# EAGLE board PCB v30 (EAGLE 9.7.0)
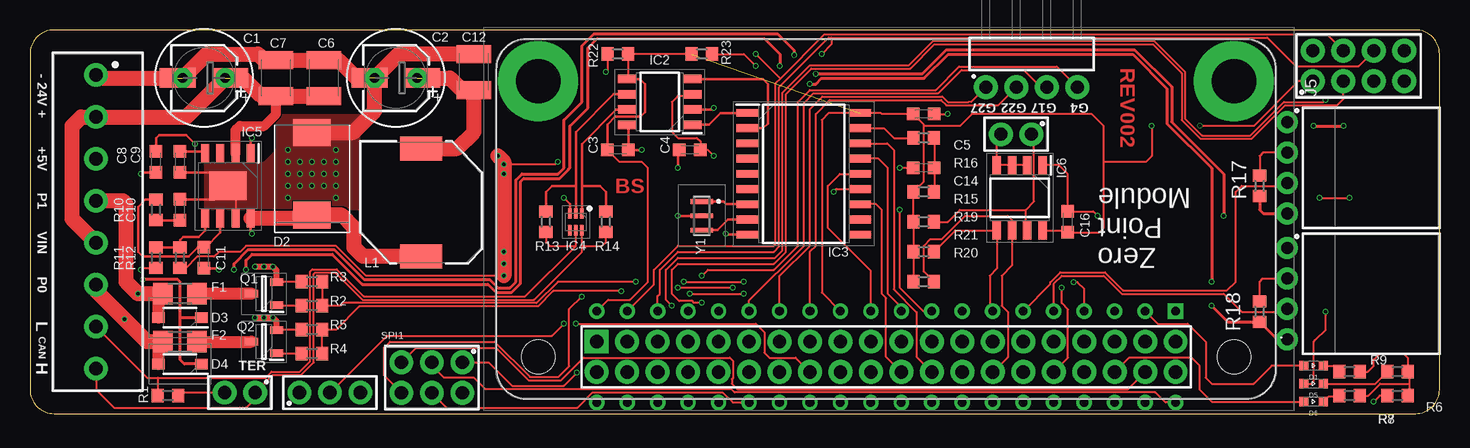
[diagram p0: board, top side]
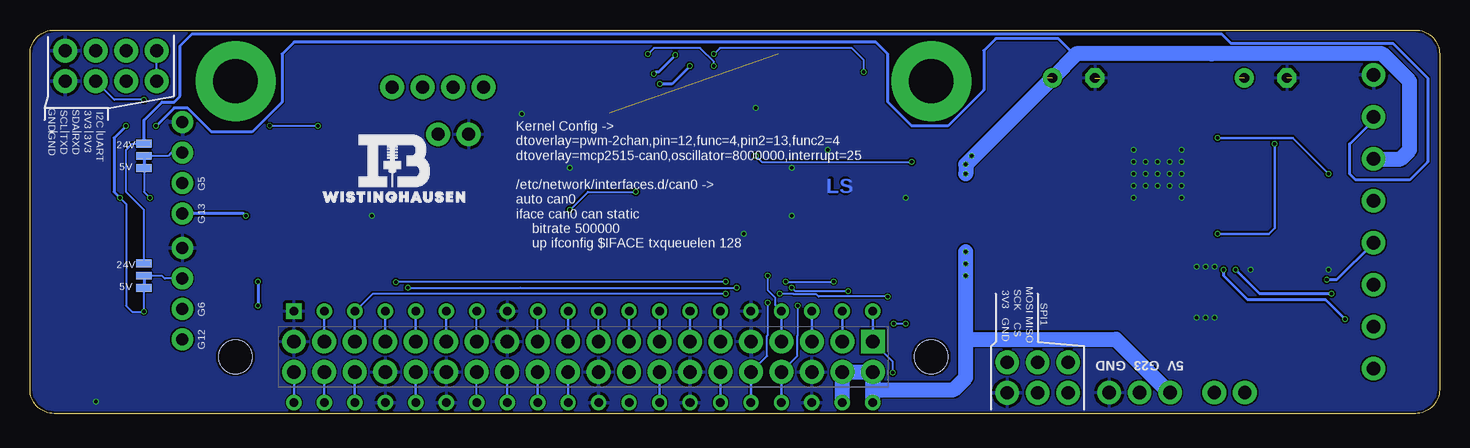
[diagram p1: board, bottom side, seen from below]

Size 117.5 x 32 mm. Coordinates in mm from the lower left corner, seen from the top.
Outline: 0,30 0,2 arc90 2,0 115.5,0 arc90 117.5,2 117.5,30 arc90 115.5,32 2,32 arc90 0,30
Copper layers (1*16): Top / Bottom
Stack-up Default Layer Stack: Top User Defined 0.035mm / Dielectric-1 User Defined 1.6mm / Bottom User Defined 0.035mm
Design rules "jlcpcb-2layers": minimum track width 5mil, minimum drill 0.3mm, track to track 5mil, track to pad 5mil, pad to pad 5mil, via to via 5mil, smd to smd 5mil, copper to edge 0.2mm, drill to drill 6mil, minimum pad ring 10mil, minimum via ring 3mil, stop-mask expansion 4mil, vias tented up to drill 0mil, thermal gap 10mil

## Footprints (pad centres in the part's own frame; a part is rotated, then mirrored left to right if it is on the bottom)
E3,5-8 = drill 0.813 pad 1.6: + -1.778,0 | drill 0.813 pad 1.6 octagon: - 1.778,0
C0603K = smd 1.05 x 1.08: 1 -0.875,0; 2 0.875,0
C1210K = smd 1.5 x 2.9: 1 -1.5,0; 2 1.5,0
WCAP-ASLL_5X5.5(DXL) = smd 3 x 1.6: 1 2.2,0; 2 -2.2,0
WL-SMCC_0603_R_Y_V = smd 0.75 x 0.8: 1 -0.825,0; 2 0.825,0
DIOM7959X625N = smd 2.252 x 3.12: 1 -3.457,0; 2 3.457,0
SOD3716X135N = smd 1.05 x 0.85: 1 -1.8,0; 2 1.8,0
R1206 = smd 1.6 x 1.803: 1 -1.422,0; 2 1.422,0
RASPBERRYPIZEROWV13 = drill 1.11 pad 1.665 square: 1 48.26,0.31 | drill 0.71: 1.2 48.26,-2.23; 2.2 48.26,5.39; 3.2 45.72,-2.23; 4.2 45.72,5.39; 5.2 43.18,-2.23; 6.2 43.18,5.39; 7.2 40.64,-2.23; 8.2 40.64,5.39; 9.2 38.1,-2.23; 10.2 38.1,5.39; 11.2 35.56,-2.23; 12.2 35.56,5.39; 13.2 33.02,-2.23; 14.2 33.02,5.39; 15.2 30.48,-2.23; 16.2 30.48,5.39; 17.2 27.94,-2.23; 18.2 27.94,5.39; 19.2 25.4,-2.23; 20.2 25.4,5.39; 21.2 22.86,-2.23; 22.2 22.86,5.39; 23.2 20.32,-2.23; 24.2 20.32,5.39; 25.2 17.78,-2.23; 26.2 17.78,5.39; 27.2 15.24,-2.23; 28.2 15.24,5.39; 29.2 12.7,-2.23; 30.2 12.7,5.39; 31.2 10.16,-2.23; 32.2 10.16,5.39; 33.2 7.62,-2.23; 34.2 7.62,5.39; 35.2 5.08,-2.23; 36.2 5.08,5.39; 37.2 2.54,-2.23; 38.2 2.54,5.39; 40.2 0,5.39 | drill 1.11 pad 1.665: 2 48.26,2.85; 3 45.72,0.31; 4 45.72,2.85; 5 43.18,0.31; 6 43.18,2.85; 7 40.64,0.31; 8 40.64,2.85; 9 38.1,0.31; 10 38.1,2.85; 11 35.56,0.31; 12 35.56,2.85; 13 33.02,0.31; 14 33.02,2.85; 15 30.48,0.31; 16 30.48,2.85; 17 27.94,0.31; 18 27.94,2.85; 19 25.4,0.31; 20 25.4,2.85; 21 22.86,0.31; 22 22.86,2.85; 23 20.32,0.31; 24 20.32,2.85; 25 17.78,0.31; 26 17.78,2.85; 27 15.24,0.31; 28 15.24,2.85; 29 12.7,0.31; 30 12.7,2.85; 31 10.16,0.31; 32 10.16,2.85; 33 7.62,0.31; 34 7.62,2.85; 35 5.08,0.31; 36 5.08,2.85; 37 2.54,0.31; 38 2.54,2.85; 39 0,0.31; 40 0,2.85 | drill 0.71 square: 39.2 0,-2.23 | drill 3.7 pad 6: P$1 -4.87,-21.42; P$2 53.13,-21.42 | hole 2.8: -4.87,1.58; 53.13,1.58
SOIC127P600X175-8N = smd 1.525 x 0.7: 1 -2.712,1.905; 2 -2.712,0.635; 3 -2.712,-0.635; 4 -2.712,-1.905; 5 2.712,-1.905; 6 2.712,-0.635; 7 2.712,0.635; 8 2.712,1.905
SOIC127P1030X265-18N = smd 1.85 x 0.65: 1 -4.675,5.08; 2 -4.675,3.81; 3 -4.675,2.54; 4 -4.675,1.27; 5 -4.675,0; 6 -4.675,-1.27; 7 -4.675,-2.54; 8 -4.675,-3.81; 9 -4.675,-5.08; 10 4.675,-5.08; 11 4.675,-3.81; 12 4.675,-2.54; 13 4.675,-1.27; 14 4.675,0; 15 4.675,1.27; 16 4.675,2.54; 17 4.675,3.81; 18 4.675,5.08
SON50P150X170X55-6N = smd 0.85 x 0.3: 1 -0.7,0.5; 2 -0.7,0; 3 -0.7,-0.5; 4 0.7,-0.5; 5 0.7,0; 6 0.7,0.5
SOIC127P600X170-9N = smd 1.525 x 0.65: 1 -2.712,1.905; 2 -2.712,0.635; 3 -2.712,-0.635; 4 -2.712,-1.905; 5 2.712,-1.905; 6 2.712,-0.635; 7 2.712,0.635; 8 2.712,1.905 | smd 2.4 x 3.1: 9 0,0
61300821121 = drill 1.1: 1 -3.81,-1.27; 2 -3.81,1.27; 3 -1.27,-1.27; 4 -1.27,1.27; 5 1.27,-1.27; 6 1.27,1.27; 7 3.81,-1.27; 8 3.81,1.27
61300311121 = drill 1.1: 1 -2.54,0; 2 0,0; 3 2.54,0
691243110008 = drill 1.1: 1 -12.25,0; 2 -8.75,0; 3 -5.25,0; 4 -1.75,0; 5 1.75,0; 6 5.25,0; 7 8.75,0; 8 12.25,0
61300621121 = drill 1.1: 1 -2.54,-1.27; 2 -2.54,1.27; 3 0,-1.27; 4 0,1.27; 5 2.54,-1.27; 6 2.54,1.27
66100411722 = drill 1: 1 3.81,2.7; 2 1.27,2.7; 3 -1.27,2.7; 4 -3.81,2.7
61300211121 = drill 1.1: 1 -1.27,0; 2 1.27,0
61300411021 = drill 1.1: 1 3.81,2.77; 2 1.27,2.77; 3 -1.27,2.77; 4 -3.81,2.77
SMT-JUMPER_3_1-NC_TRACE_NO-SILK = smd 0.635 x 1.27: 1 -1.016,0; 2 0,0; 3 1.016,0
WE-PD_1050P = smd 2 x 3.5: 1 -4.5,0; 2 4.5,0
SOT96P240X110-3N = smd 1.1 x 0.65: 1 -1.05,0.96; 2 -1.05,-0.96; 3 1.05,0
R0603 = smd 1 x 1.1: 1 -0.85,0; 2 0.85,0
CSTNE12M0GH5L000R0 = smd 0.4 x 1.9: 1 1.2,0; 2 0,0; 3 -1.2,0

## Placement (x,y rotation side)
C1  [E3,5-8]  14.5,28 180 top
C2  [E3,5-8]  30.5,28 180 top
C3  100nF  [C0603K]  49,22 180 top
C4  100nF  [C0603K]  55,22 0 top
C5  100nF  [C0603K]  74.5,25 180 top
C6  10uF 25V  [C1210K]  24.5,28 270 top
C7  10uF 25V  [C1210K]  20.5,28 270 top
C8  100nF  [C0603K]  10.5,21 270 top
C9  8.2nF  [C0603K]  12.5,21 90 top
C10  1nF  [C0603K]  12.5,17 270 top
C11  10pF  [C0603K]  14.5,13 90 top
C12  10uF 25V  [C1210K]  37,28.5 270 top
C13  47 µF  [WCAP-ASLL_5X5.5(DXL)]  14.5,28 0 top
C14  100nF  [C0603K]  74.5,20.5 0 top
C15  47 µF  [WCAP-ASLL_5X5.5(DXL)]  30.5,28 0 top
C16  100nF  [C0603K]  86.5,16 90 top
D1  RED  [WL-SMCC_0603_R_Y_V]  107,4 180 top
D2  DIODE  [DIOM7959X625N]  23.5,20 90 top
D3  1N4148W-TP  [SOD3716X135N]  12.5,8 180 top
D4  1N4148W-TP  [SOD3716X135N]  12.5,4.13 180 top
D5  RED  [WL-SMCC_0603_R_Y_V]  107,2.5 180 top
D6  RED  [WL-SMCC_0603_R_Y_V]  107,1 180 top
F1  24V 1A  [R1206]  12.5,10 0 top
F2  24V 1A  [R1206]  12.5,6 180 top
IC1  RASPBERRY_PI_ZERO_W__V1.3_  [RASPBERRYPIZEROWV13]  95.5,6.31 180 top
IC2  MCP2562T-E_SN  [SOIC127P600X175-8N]  52.5,26 180 top
IC3  MCP2515T-I_SO  [SOIC127P1030X265-18N]  64.5,20 0 top
IC4  ECMF02-2AMX6  [SON50P150X170X55-6N]  45.5,16 270 top
IC5  TPS54531DDAR  [SOIC127P600X170-9N]  16.5,19 270 top
IC6  CAT24C32WI-GT3  [SOIC127P600X175-8N]  82.5,18 270 top
J1  [61300821121]  110.75,29 0 top
J2  [61300311121]  25,1.75 0 top
J3  [691243110008]  5.5,16 270 top
J4  [61300621121]  33.5,3 180 top
J5  66100411722  [66100411722]  107.5,20.5 90 top
J6  66100411722  [66100411722]  107.5,10 90 top
J7  [61300211121]  17.5,1.75 180 top
J8  [61300411021]  83.5,30 180 top
J9  [61300211121]  82.2,23.3 180 top
JP1  JUMPER-SMT_3_1-NC_TRACE_NO-SILK  [SMT-JUMPER_3_1-NC_TRACE_NO-SILK]  108,21.5 270 bottom
JP2  JUMPER-SMT_3_1-NC_TRACE_NO-SILK  [SMT-JUMPER_3_1-NC_TRACE_NO-SILK]  108,11.5 270 bottom
L1  5.6uH  [WE-PD_1050P]  32.6,17.61 90 top
Q1  DMG3402L-7  [SOT96P240X110-3N]  19.5,10 180 top
Q2  DMG3402L-7  [SOT96P240X110-3N]  19.5,6 180 top
R1  120R  [R0603]  11.5,1.5 0 top
R2  1K  [R0603]  23.5,9 0 top
R3  100K  [R0603]  23.5,11 0 top
R4  1K  [R0603]  23.5,5 0 top
R5  100K  [R0603]  23.5,7 0 top
R6  1K96  [R0603]  114,3.5 0 top
R7  1K  [R0603]  110,3.5 0 top
R8  1K  [R0603]  110,1.5 0 top
R9  0R  [R0603]  114,1.5 0 top
R10  60K4  [R0603]  10.5,17 270 top
R11  1K96  [R0603]  10.5,13 270 top
R12  10K2  [R0603]  12.5,13 90 top
R13  0R/DNP  [R0603]  43,16 90 top
R14  0R/DNP  [R0603]  48,16 90 top
R15  10K2  [R0603]  74.5,18.5 180 top
R16  1K  [R0603]  74.5,23 180 top
R17  1K  [R0603]  102.5,19 270 top
R18  1K  [R0603]  102.5,8.5 270 top
R19  1K  [R0603]  74.5,16 180 top
R20  4K7  [R0603]  74.5,11 180 top
R21  4K7  [R0603]  74.5,13.5 180 top
R22  4K7  [R0603]  49,30 0 top
R23  4K7  [R0603]  56,30 180 top
Y1  CSTNE8M00GH5C000R0  [CSTNE12M0GH5L000R0]  56,16.5 90 top

## Library data of the parts
C1-C12 C14 C16 = rcl; SPICEPREFIX: C
C13 C15 = Wurth_Capacitors_WCAP-ASLL; DATASHEET-URL: https://www.we-online.com/catalog/datasheet/865060142003.pdf; DF: 22%; DIAMETER: 5mm; I-LEAK: 3uA; I-RIPPLE: 160mA; L: 5.5mm; OPERATING-TEMPERATURE: -55 °C up to +105 °C; PART-NUMBER: 865060142003; TECHNICAL-REFERENCE: ASEC055470M6R3DVCTBB000; VR: 6.3V(DC); Z: 0.8Ohm
D1 D5 D6 = Wurth_LEDs_WL-SMCC; ABSTRAHLWINKEL: 120°; CHIP-TECHNOLOGY: AlInGaP; DATASHEET-URL: https://www.we-online.com/catalog/datasheet/150060RS73220.pdf; EMITTING-COLOR: Red; I-V-TYP: 90mcd; LAMDA-DOM-TYP: 624nm; LAMDA-PEAK-TYP: 632nm; PART-NUMBER: 150060RS73220; V-F-TYP: 2V
D2 = Diode; CATEGORY: Diode; SUB-CATEGORY: Rectifier
D3 D4 = pke; ARROW_PART_NUMBER: 1N4148W-TP; ARROW_PRICE-STOCK: https://www.arrow.com/en/products/1n4148w-tp/micro-commercial-components; DESCRIPTION: MICRO COMMERCIAL COMPONENTS - 1N4148W-TP - SWITCHING DIODE, 150mA, 100V, SOD123, FULL REEL; HEIGHT: 1.35mm; MANUFACTURER_NAME: Micro Commercial Components (MCC); MANUFACTURER_PART_NUMBER: 1N4148W-TP; MOUSER_PART_NUMBER: 833-1N4148W-TP; MOUSER_PRICE-STOCK: https://www.mouser.co.uk/ProductDetail/Micro-Commercial-Components-MCC/1N4148W-TP?qs=KFo7JewZbUH7wCMabJ4EeQ%3D%3D
F1 F2 = adafruit
IC1 = Library; DESCRIPTION: Raspberry Pi Zero W (v1.3) Single-board Computers; HEIGHT: mm; MANUFACTURER_NAME: RASPBERRY-PI; MANUFACTURER_PART_NUMBER: Raspberry Pi Zero W (v1.3)
IC2 = Library; ARROW_PART_NUMBER: MCP2562T-E/SN; ARROW_PRICE-STOCK: https://www.arrow.com/en/products/mcp2562t-esn/microchip-technology?region=nac; DESCRIPTION: MICROCHIP - MCP2562T-E/SN - , CAN, ISO11898-2/5, CAN, 4.5 V, 5.5 V, NSOIC; HEIGHT: 1.75mm; MANUFACTURER_NAME: Microchip; MANUFACTURER_PART_NUMBER: MCP2562T-E/SN; MOUSER_PART_NUMBER: 579-MCP2562T-E/SN; MOUSER_PRICE-STOCK: https://www.mouser.co.uk/ProductDetail/Microchip-Technology/MCP2562T-E-SN?qs=eTPcRhULBzyVnEfrVUWSlA%3D%3D
IC3 = Library; ARROW_PART_NUMBER: MCP2515T-I/SO; ARROW_PRICE-STOCK: https://www.arrow.com/en/products/mcp2515t-iso/microchip-technology?region=nac; DESCRIPTION: Microchip Technology MCP2515T-I/SO, CAN Controller 1Mbit/s, 18-Pin SOIC; HEIGHT: 2.65mm; MANUFACTURER_NAME: Microchip; MANUFACTURER_PART_NUMBER: MCP2515T-I/SO; MOUSER_PART_NUMBER: 579-MCP2515T-I/SO; MOUSER_PRICE-STOCK: https://www.mouser.co.uk/ProductDetail/Microchip-Technology/MCP2515T-I-SO?qs=uMUszenkLLKzXVzy0vTLgQ%3D%3D
IC4 = pke; DESCRIPTION: Common Mode Filter & ESD Prot. USB uQFN6 STMicroelectronics ECMF02 Series, Signal Filter, 200mA uQFN SMD, Flat Contact Termination, 1.8 x 1.6 x 0.5mm; HEIGHT: 0.55mm; MANUFACTURER_NAME: STMicroelectronics; MANUFACTURER_PART_NUMBER: ECMF02-2AMX6; MOUSER_PART_NUMBER: 511-ECMF02-2AMX6; MOUSER_PRICE-STOCK: https://www.mouser.com/Search/Refine.aspx?Keyword=511-ECMF02-2AMX6; RS_PART_NUMBER: 8805276P; RS_PRICE-STOCK: http://uk.rs-online.com/web/p/products/8805276P
IC5 = pke; ARROW_PART_NUMBER: TPS54531DDAR; ARROW_PRICE-STOCK: https://www.arrow.com/en/products/tps54531ddar/texas-instruments?region=nac; DESCRIPTION: 3.5V to 28V Input, 5A, 570kHz Step-Down Converter with Eco-mode; HEIGHT: 1.7mm; MANUFACTURER_NAME: Texas Instruments; MANUFACTURER_PART_NUMBER: TPS54531DDAR; MOUSER_PART_NUMBER: 595-TPS54531DDAR; MOUSER_PRICE-STOCK: https://www.mouser.co.uk/ProductDetail/Texas-Instruments/TPS54531DDAR?qs=jA5Ki6243onykODzUePbag%3D%3D
IC6 = Library; ARROW_PART_NUMBER: CAT24C32WI-GT3; ARROW_PRICE-STOCK: https://www.arrow.com/en/products/cat24c32wi-gt3/on-semiconductor; DESCRIPTION: EEPROM Serial-I2C 32K 4Kx8 1.8V/5V SOIC8 CAT24C32WI-GT3, EEPROM Memory 32kbit,, 4096 x, 8bit, Serial-I2C 1.7 5.5 V, 8-Pin SOIC; HEIGHT: 1.75mm; MANUFACTURER_NAME: onsemi; MANUFACTURER_PART_NUMBER: CAT24C32WI-GT3; MOUSER_PART_NUMBER: 698-CAT24C32WI-GT3; MOUSER_PRICE-STOCK: https://www.mouser.co.uk/ProductDetail/onsemi/CAT24C32WI-GT3?qs=rZgeL6XvLwaTa79VuYkKQA%3D%3D
J1 = Wurth_Connectors_WR-PHD; DATASHEET-URL: https://katalog.we-online.com/em/datasheet/61300821121.pdf; GENDER: Pin Header; IR: 3A; MATES: WR-PHD 2.54mm Angled DualSocket Header/Dual Socket Header/Dual Socket Header Bottom Entry/Dual Socket Header Bottom Entry Large/SMT Dual Socket Header/SMT Dual Socket Header Bottom Entry; PACKAGING: Bag; PART-NUMBER: 61300821121; PINS: 8; ROWS: Dual; TYPE: Board Stacker
J2 = Wurth_Connectors_WR-PHD; DATASHEET-URL: https://katalog.we-online.com/em/datasheet/61300311121.pdf; GENDER: Pin Header; IR: 3A; MATES: WR-PHD 2.54mm Angled Socket Header /SMT Socket Header/Socket Header; PACKAGING: Bag; PART-NUMBER: 61300311121; PINS: 3; ROWS: Single; TYPE: Straight
J3 = Wurth_Connectors_WR-TBL Rising Cage Clamp; DATASHEET-URL: https://www.we-online.com/catalog/datasheet/691243110008.pdf; IR-UL: 10A; IR-VDE: 10A; MOUNT: THT; PART-NUMBER: 691243110008; PINS: 8; PITCH: 3.5mm; TYPE: Horizontal; WIRE: 30 to 16 (AWG) 0.05 to 1.31 (mm²); WORKING-VOLTAGE-UL: 300V (AC); WORKING-VOLTAGE-VDE: 130V (AC)
J4 = Wurth_Connectors_WR-PHD; DATASHEET-URL: https://katalog.we-online.com/em/datasheet/61300621121.pdf; GENDER: Pin Header; IR: 3A; MATES: WR-PHD 2.54mm Angled DualSocket Header/Dual Socket Header/Dual Socket Header Bottom Entry/Dual Socket Header Bottom Entry Large/SMT Dual Socket Header/SMT Dual Socket Header Bottom Entry; PACKAGING: Bag; PART-NUMBER: 61300621121; PINS: 6; ROWS: Dual; TYPE: Board Stacker
J5 J6 = Wurth_Connectors_WR-WTB; CONTACT-RESISTANCE: 20mOhm; DATASHEET-URL: https://www.we-online.com/catalog/datasheet/66100411722.pdf; GENDER: Male; IR: 3A; L: 9.86mm; MOUNT: THT; PACKAGING: Box; PART-NUMBER: 66100411722; PCB-CABLE-PANEL: PCB; PINS: 4; PITCH: 2.54mm; TOL-R: max.; TYPE: Right Angled; WORKING-VOLTAGE: 50V(AC)
J7 J9 = Wurth_Connectors_WR-PHD; DATASHEET-URL: https://katalog.we-online.com/em/datasheet/61300211121.pdf; GENDER: Pin Header; IR: 3A; MATES: WR-PHD 2.54mm Angled Socket Header /SMT Socket Header/Socket Header; PACKAGING: Bag; PART-NUMBER: 61300211121; PINS: 2; ROWS: Single; TYPE: Straight
J8 = Wurth_Connectors_WR-PHD; DATASHEET-URL: https://katalog.we-online.com/em/datasheet/61300411021.pdf; GENDER: Pin Header; IR: 3A; MATES: WR-PHD 2.5mm Angled Socket Header/SMT Socket Header/Socket Header/Soket Header Bottom Entry; PACKAGING: Bag; PART-NUMBER: 61300411021; PINS: 4; ROWS: Single; TYPE: Angled
JP1 JP2 = SparkFun-Jumpers
L1 = Wurth_Power Magnetics_WE-PD; DATASHEET-URL: https://www.we-online.com/catalog/datasheet/7447714056.pdf; FRES: 28MHz; IR: 6A; ISAT: 7.2A; JLC: C149541; MOUNT: SMT; PART-NUMBER: 7447714056; RDC-MAX: 14.4mOhm; RDC-TYP: 12mOhm; VERSION: Performance
Q1 Q2 = pke; ARROW_PART_NUMBER: DMG3402L-7; ARROW_PRICE-STOCK: https://www.arrow.com/en/products/dmg3402l-7/diodes-incorporated; DESCRIPTION: Diodes Inc DMG3402L-7 N-channel MOSFET Transistor, 4 A, 30 V, 3-Pin SOT-23; HEIGHT: 1.1mm; MANUFACTURER_NAME: Diodes Inc.; MANUFACTURER_PART_NUMBER: DMG3402L-7; MOUSER_PART_NUMBER: 621-DMG3402L-7; MOUSER_PRICE-STOCK: https://www.mouser.co.uk/ProductDetail/Diodes-Incorporated/DMG3402L-7?qs=M%2FOdCRO8QQ3OmR%252BxqWZuSw%3D%3D
R1-R23 = rcl; SPICEPREFIX: R
Y1 = pke; DESCRIPTION: Resonators 8.0000MHz 33pF SMD CHP Rsntr 0.07% AUTO; HEIGHT: 0.8mm; MANUFACTURER_NAME: Murata Electronics; MANUFACTURER_PART_NUMBER: CSTNE8M00GH5C000R0; MOUSER_PART_NUMBER: 81-CSTNE8M00GH5C000R; MOUSER_PRICE-STOCK: https://www.mouser.com/Search/Refine.aspx?Keyword=81-CSTNE8M00GH5C000R

## Nets
5VBOOT: C8.2 IC5.1
5VCOMP: C11.2 IC5.6 R10.1
5VPH: C8.1 D2.1 IC5.8 L1.1
5VSENSE: IC5.5 R11.1 R12.2
5VSS: C9.2 IC5.4
+3V3: C3.2 C5.2 C16.1 IC1.1 IC1.1.2 IC1.17 IC1.17.2 IC2.5 IC3.18 IC6.8 J1.1 J1.2 J4.1 R15.2 R19.2 R20.2 R21.2 R22.2 R23.2
+5V: C2.+ C4.2 C12.2 C15.1 D5.2 IC1.2 IC1.2.2 IC1.4 IC1.4.2 IC2.3 J2.1 J3.3 JP1.3 JP2.3 L1.2 R12.1
+24V: C1.+ C6.2 C7.2 C13.1 D3.1 D4.1 IC5.2 J3.2 J3.5 JP1.1 JP2.1
CAN_INT: IC1.22 IC1.22.2 IC3.12
CAN_RST: IC3.17 R16.2
CANH: IC2.7 IC4.1 R14.2
CANH_F: IC4.6 J3.8 J7.1 R14.1
CANL: IC2.6 IC4.2 R13.2
CANL_F: IC4.5 J3.7 R1.1 R13.1
GND: C1.- C2.- C3.1 C4.1 C5.1 C6.1 C7.1 C9.1 C10.1 C11.1 C12.1 C13.2 C14.1 C15.2 C16.2 D2.2 IC1.6 IC1.6.2 IC1.9 IC1.9.2 IC1.14 IC1.14.2 IC1.20 IC1.20.2 IC1.25 IC1.25.2 IC1.30 IC1.30.2 IC1.34 IC1.34.2 IC1.39 IC1.39.2 IC2.2 IC2.8 IC3.9 IC4.3 IC5.7 IC5.9 IC6.1 IC6.2 IC6.3 IC6.4 J1.7 J1.8 J2.3 J3.1 J4.2 J5.1 J6.1 J9.2 Q1.2 Q2.2 R3.1 R5.1 R9.1 R11.2 Y1.2
GPIO4: IC1.7 IC1.7.2 J8.4
GPIO5: IC1.29 IC1.29.2 J5.3
GPIO6: IC1.31 IC1.31.2 J6.3
GPIO7: IC1.26 IC1.26.2
GPIO16: D6.2 IC1.36 IC1.36.2
GPIO17: IC1.11 IC1.11.2 J8.3
GPIO22: IC1.15 IC1.15.2 J8.2
GPIO23: IC1.16 IC1.16.2 J2.2
GPIO26: D1.2 IC1.37 IC1.37.2
GPIO27: IC1.13 IC1.13.2 J8.1
ID_SCL: IC1.28 IC1.28.2 IC6.6 R20.1
ID_SDA: IC1.27 IC1.27.2 IC6.5 R21.1
ID_WP: IC6.7 J9.1 R19.1
LED_B: D6.1 R8.1
LED_COMMON: R6.2 R7.2 R8.2 R9.2
LED_G: D5.1 R6.1
LED_R: D1.1 R7.1
N$1: J6.2 JP2.2 R18.1
N$2: J5.2 JP1.2 R17.1
N$4: C14.2 R15.1 R16.1
N$7: IC3.8 Y1.3
N$8: IC3.7 Y1.1
N$49: C10.2 R10.2
N$111: J7.2 R1.2
PWM0: Q2.1 R4.1
PWM0_FUSE: F2.1 Q2.3
PWM0_GATE: IC1.32 IC1.32.2 R4.2 R5.2
PWM0_IN: D4.2 F2.2 J3.6 J6.4 R18.2
PWM1: Q1.1 R2.1
PWM1_FUSE: F1.2 Q1.3
PWM1_GATE: IC1.33 IC1.33.2 R2.2 R3.2
PWM1_IN: D3.2 F1.1 J3.4 J5.4 R17.2
RXCAN: IC2.4 IC3.2
RXD: IC1.10 IC1.10.2 J1.3
SCL: IC1.5 IC1.5.2 J1.6 R23.1
SDA: IC1.3 IC1.3.2 J1.4 R22.1
SPI1_CS: IC1.12 IC1.12.2 J4.4
SPI1_MISO: IC1.35 IC1.35.2 J4.6
SPI1_MOSI: IC1.38 IC1.38.2 J4.5
SPI1_SCK: IC1.40 IC1.40.2 J4.3
SPI_CS: IC1.24 IC1.24.2 IC3.16
SPI_MISO: IC1.21 IC1.21.2 IC3.15
SPI_MOSI: IC1.19 IC1.19.2 IC3.14
SPI_SCK: IC1.23 IC1.23.2 IC3.13
TXCAN: IC2.1 IC3.1
TXD: IC1.8 IC1.8.2 J1.5

## Tracks (layer width: path | path; a pad name or v marks a point on that pad's centre or on a via)
5VBOOT  (via drill 0.3)
  Top 0.2: IC5.1 18.41,22.91 v18.5,23 | v9.25,20 9.38,20.12 C8.2
  Bottom 0.2: v18.5,23 12.25,23 v9.25,20
5VCOMP
  Top 0.2: R10.1 9.6,17.85 9,17.25 9,13.5 9.38,13.12 13.22,13.12 13.97,13.88 C11.2 14.62,13.88 15.87,15.12 IC5.6
5VPH  (via drill 0.3)
  Top 0.2: C8.1 10.5,23 10.75,23.25 13,23.25 v13.75,22.5 | v18.5,15 18.41,15.1 IC5.8
  Top 1.27: IC5.8 23.25,16.29 D2.1 26,16.54 27.02,15.53 27.02,13.85 27.75,13.11 L1.1
  Bottom 0.2: v13.75,22.5 13.75,15.5 14.25,15 v18.5,15
5VSENSE
  Top 0.2: R11.1 R12.2 12.5,14.5 12.75,14.75 14.06,14.75 14.6,15.29 IC5.5
5VSS
  Top 0.2: C9.2 14.43,21.88 IC5.4
+3V3  (via drill 0.3)  (1 unrouted)
  Top 0.152: IC1.1.2 48.2,9.5 50,9.5 51.5,11 51.5,20.5 51,21 49.12,21 C3.2 | R23.2 R22.2 49.85,27.91 IC2.5 | IC6.8 86.34,15.29 C16.1 89.12,15.12 89.5,15.5 89.5,21 | R20.2 R21.2 R19.2 R15.2 74.5,19.35 74.5,24 | 74.5,24 74.5,24.12 C5.2 71,25 70.92,25.08 IC3.18 66.58,25.08 66,24.5 66,10.1 IC1.17.2 | 89.5,21 89.5,24 88.5,25 78.5,25 77.5,24 74.5,24 | J4.1 38.23,4.27 40.18,2.32 44.5,2.32 45.5,3.32 45.5,3.36 v45.57,3.43 | J1.1 105.73,27.73 102,24 97.54,24 v97.52,24.02 | v93.5,24 93.5,21.5 93,21 89.5,21
  Top 0.2: C3.2 48.12,24.12 48.79,24.79 50.9,24.79 51.25,25.15 51.25,27.5 50.85,27.91 IC2.5
  Bottom 0.15: J1.1 J1.2
  Bottom 0.152: v45.57,3.43 45.57,4.33 IC1.1 | v97.52,24.02 93.52,24.02 v93.5,24
  Bottom 0.2: IC1.1 IC1.1.2 | IC1.17 IC1.17.2
+5V  (via drill 0.3)  (1 unrouted)
  Top 0.152: R12.1 13,12.15 13.95,13.1 15.35,13.1 15.75,13.5 17.5,13.5 18,14 25.5,14 28,11.5 v39.5,11.5 | v57,21.5 56.5,22 C4.2 55.88,22.73 55.6,23 54,23 53.5,23.5 53.5,26 54,26.5 55.08,26.5 IC2.3 | v44,21 43.78,20.78 v39.5,20.78 | v108,8.5 108,7 107.15,6.15 107,6 107,2.7 106.8,2.5 D5.2 | v107.5,18 v110,18
  Top 0.254: v107,24 v109.5,24
  Top 1.27: 32.28,22.43 L1.2 35.61,22.11 37,23.5 C12.2 36,27 35,28 C2.+ | v39,21.5 39.5,21 v39.5,20 v39.5,11.5
  Bottom 0.152: v57,21.5 56.5,21 v44,21 | JP2.3 v108,8.5 109,8.5 109.5,9 109.5,17.5 v110,18 | JP1.3 108,18.5 v107.5,18
  Bottom 0.254: 19,30 30.5,30 31.79,31.29 37,31.29 38,30.29 38,27 41,24 44,24 46,26 46,30 47,31 95.5,31 96.5,30 96.5,26 99,23.5 102.36,23.5 104.36,25.5 105.5,25.5 v107,24 | v109.5,24 110.5,23 110.5,18.5 v110,18
  Bottom 1.27: IC1.2 IC1.4 IC1.4.2 | IC1.2.2 IC1.2 | IC1.2 47.24,2.24 47,2 40.5,2 39.5,3 39.5,6.2 | 39.5,6.2 v39.5,11.5 | v39.5,20 v39.5,20.78 C2.+ 30.28,30 19,30 4.77,30 2.5,27.73 2.5,22 3.25,21.25 J3.3 | v39.5,11.5 v39.5,12.5 | v39.5,11.5 v39.5,13.5 | J2.1 22.52,1.75 26.98,6.2 39.5,6.2
+24V  (via drill 0.3)  (1 unrouted)
  Top 0.254: D4.1 12.87,4.13 12.5,4.5 12.5,8 | 12.5,8 12.5,11 12.32,11.18 v9.4,11.18 | D3.1 12.5,8
  Top 0.813: IC5.2 17.14,23.64 17.5,24 19.5,24 20.5,25 C7.2
  Top 1.27: C6.2 C7.2 19.28,26.5 17.78,28 C1.+ 13.03,24.75 J3.2 4.25,24.75 3.5,24 3.5,16.25 J3.5
  Bottom 0.152: JP2.1 108,17 109.5,18.5 109.5,22 108.98,22.52 JP1.1
  Bottom 0.254: JP1.1 108,24.5 106.5,26 105.5,26 105,26.5 105,30.67 104,31.67 18.17,31.67 17.39,30.89 3.89,30.89 1,28 1,21 2.5,19.5 7,19.5 7.5,20 7.5,22.5 5.5,24.5 J3.2 | v9.4,11.18 8.57,11.18 J3.5
CAN_INT
  Top 0.152: IC1.22 71.37,4.73 71.37,9.63 71,10 71,17 70.5,17.5 69.22,17.5 IC3.12
  Bottom 0.2: IC1.22.2 IC1.22
CAN_RST
  Top 0.152: IC3.17 71.19,23.81 72,23 R16.2
CANH
  Top 0.152: IC4.1 46,17
  Top 0.2: IC2.7 48.87,25.36 46,22.5 46,19 | 46,19 46,17 | R14.2 48,18.5 47.5,19 46,19
CANH_F
  Top 0.152: J3.8 5.5,2 7,0.5 17.5,0.5 17.77,0.5 18,0.5 18.77,1.27 J7.1 20.25,3.22 22.62,3.22 23.65,4.25 23.65,11.63 23.77,11.75 25.46,11.75 27.71,9.5 42,9.5 46,13.5 46,14 | 46,14 IC4.6 | 46,14 47.7,14 48,14.3 R14.1
CANL
  Top 0.2: IC2.6 48.63,26.64 45.5,23.5 45.5,19 | 45.5,19 IC4.2 | R13.2 43,18.5 43.5,19 45.5,19
CANL_F
  Top 0.152: J3.7 9.75,3 10.65,3 | 10.65,3 R1.1 | 45.5,14 IC4.5 | R13.1 43,14.3 43.3,14 45.5,14 | 10.65,3 19.63,3 20.13,3.5 22.49,3.5 23.35,4.37 23.35,11.85 23.53,12.03 25.57,12.03 27.82,9.78 41.28,9.78 45.5,14
GND  (via drill 0.3)  (2 unrouted)
  Top 0.152: Q2.2 20.55,7 R5.1 | R3.1 22.61,10.96 Q1.2 | R11.2 9.4,12.15 v9.25,12 | IC5.7 17.14,18.36 IC5.9 | C5.1 v76.5,25 | C14.1 v72.5,20.5 | R9.1 112.5,1.5 v112,1 | IC6.1 85.79,20.71 86.5,20 C16.2 88.62,16.88 v89,16.5 | IC6.2 IC6.3 IC6.4 80.59,22.96 J9.2
  Top 0.2: C9.1 15.38,20.12 IC5.9 15.38,17.88 C10.1 | v15.75,12 15.62,12.12 C11.1 | IC2.8 49.88,24.02 C3.1 v51,22 | C4.1 54,21.88 v54,20.5 | IC4.3 45,17.5 v44.5,18 | Y1.2 v54,16.5 | IC3.9 58.08,14.92 v58,15 | IC2.2 56.87,25.36 v57,25.5
  Top 0.508: Q2.2 20.55,7.7 v20.25,8 v19.5,8 v18.75,8 | Q1.2 20.55,11.95 v20.25,12.25 v19.5,12.25 v18.75,12.25
  Top 1.27: J3.1 5.75,28.25 6,28 C1.- 14.72,30 19,30 19.5,29.5 C7.1 C6.1 25.72,29.5 27.22,28 C2.- | C12.1 30.72,30 C2.- | D2.2 26.96,23.46 28.72,25.22 C2.-
  other vias: 23.5,20 22.5,20 21.5,20 21.5,21 22.5,21 23.5,21 24.5,20 25.5,20 25.5,21 24.5,21 25.5,19 24.5,19 23.5,19 22.5,19 21.5,19 21.5,22 25.5,22 21.5,18 25.5,18
  pour Top (no thermals): 14.5,21 14.5,17 27.5,17 27.5,25 20.5,25 20.5,22 19.5,21
  pour Bottom: -0.5,32 -0.5,0 117.5,0 117.5,32
GPIO4  (via drill 0.3)
  Top 0.152: v56,11.5 56.5,12 62,12 64,14 64,26 65,27 75.5,27 77.44,28.94 85.6,28.94 J8.4
  Bottom 0.152: IC1.7.2 55.37,9.05 55.37,9.65 56,10.28 v56,11.5
  Bottom 0.2: IC1.7 IC1.7.2
GPIO5
  Top 0.152: J5.3 104.57,19 101,19 100.5,18.5 100.5,11 99.78,10.28 91.12,10.28 89.62,11.78 85.88,11.78 85.06,10.96 85.06,10.8 IC1.29.2
  Bottom 0.2: IC1.29 IC1.29.2
GPIO6
  Top 0.152: IC1.31.2 85.34,10.84 86,11.5 89.5,11.5 91,10 99.5,10 101,8.5 104.57,8.5 J6.3
  Bottom 0.2: IC1.31 IC1.31.2
GPIO7
  Bottom 0.2: IC1.26.2 IC1.26
GPIO16
  Top 0.152: IC1.36 91.62,4.66 96.84,4.66 97.5,4 97.5,2 98.5,1 D6.2
  Bottom 0.2: IC1.36.2 IC1.36
GPIO17
  Top 0.152: IC1.11.2 59.94,9.44 64.5,14 64.5,25.89 65.33,26.72 75.72,26.72 77.66,28.66 82.84,28.66 84.27,27.23 J8.3
  Bottom 0.2: IC1.11 IC1.11.2
GPIO22
  Top 0.152: IC1.15.2 65.02,13.52 65.5,14 65.5,25 66.66,26.16 75.94,26.16 76.38,25.72 80.72,25.72 J8.2
  Bottom 0.2: IC1.15 IC1.15.2
GPIO23  (via drill 0.3)
  Top 0.152: J2.2 29.75,6.5 43.5,6.5 v44.5,7.5 | v45.5,7.5 60.5,7.5 61.21,6.79 61.21,5.08 61.63,4.66 63.82,4.66 IC1.16
  Bottom 0.152: v44.5,7.5 v45.5,7.5
  Bottom 0.2: IC1.16.2 IC1.16
GPIO26
  Top 0.152: IC1.37.2 94,7.5 96.5,7.5 98,6 98,3 98.5,2.5 102,2.5 103.5,4 D1.2
  Bottom 0.2: IC1.37 IC1.37.2
GPIO27
  Top 0.152: IC1.13.2 62.48,11.48 65,14 65,25.39 66.05,26.44 76.06,26.44 76.5,26 78.23,26 78.47,26.01 J8.1
  Bottom 0.2: IC1.13 IC1.13.2
ID_SCL
  Top 0.152: R20.1 74.5,11.85 74.5,13.99 75.07,14.55 76.01,14.55 77.95,16.5 81.5,16.5 81.86,16.14 IC6.6 81.86,12.37 81,11.5 81,9 81.5,8.5 81.5,4.7 IC1.28
  Bottom 0.152: IC1.28.2 IC1.28
ID_SDA
  Top 0.152: R21.1 77.14,15.29 IC6.5 80.59,12.1 80,11.5 80,8.8 IC1.27.2
  Bottom 0.152: IC1.27 IC1.27.2
ID_WP
  Top 0.152: R19.1 76.5,16 77.5,17 83,17 | 83,17 83.69,17.69 83.69,23.08 J9.1 | IC6.7 83,15.42 83,17
LED_B
  Top 0.152: R8.1 109.08,1.43 108.25,1.43 D6.1
LED_COMMON
  Top 0.152: R8.2 111.55,1.5 112.55,2.5 115,2.5 | 115,2.5 115,3.35 R6.2 114.85,4.65 114.5,5 112.5,5 112,4.5 112,4 111.5,3.5 R7.2 | R9.2 115,1.65 115,2.5
LED_G
  Top 0.152: R6.1 112.15,2.5 D5.1
LED_R
  Top 0.152: D1.1 108.65,4 R7.1
N$1
  Top 0.152: R18.1 102.5,11 102.77,11.27 J6.2
  Bottom 0.152: J6.2 106.27,11.27 106.5,11.5 JP2.2
N$2
  Top 0.152: J5.2 102.77,21.77 102.5,21.5 R17.1
  Bottom 0.152: J5.2 105.73,21.77 106,21.5 JP1.2
N$4
  Top 0.152: R16.1 75.38,22.98 C14.2 75.38,18.52 R15.1
N$7
  Top 0.2: Y1.3 57.3,15.3 58.19,16.19 IC3.8
N$8
  Top 0.2: Y1.1 57.8,17.7 58.04,17.46 IC3.7
N$49
  Top 0.2: C10.2 10.53,16.12 R10.2
N$111
  Top 0.15: J7.2 12.6,1.75 R1.2
PWM0
  Top 0.152: Q2.1 22.61,5.04 R4.1
PWM0_FUSE
  Top 1.016: F2.1 Q2.3
PWM0_GATE  (via drill 0.3)
  Top 0.15: IC1.32 86.54,4.66 86.54,8.68 86,9.22 v86,10.49 | v58.57,10.5 v54,10.5
  Top 0.152: 24.5,7 25.5,7 27.44,8.94 42.34,8.94 43.61,10.22 v49.28,10.22 | 24.5,7 R5.2 | R4.2 24.35,6.85 24.5,7
  Bottom 0.15: v54,10.5 53.72,10.22 v49.28,10.22 | v86,10.49 76.64,10.49 76.62,10.5 v58.57,10.5
  Bottom 0.2: IC1.32.2 IC1.32
PWM0_IN  (via drill 0.3)
  Top 0.254: v18,12 18,12.79 18.5,13.29 25.2,13.29 27.7,10.79 38.17,10.79 38.84,10.12 40.16,10.12 40.88,10.84 40.88,19.34 41.16,19.62 44.16,19.62 44.88,20.34 44.88,20.38 45,20.5 45,24 46.5,25.5 46.5,30.5 47.29,31.29 61.21,31.29 62.5,30 v62.5,29 | v65,27.5 65.5,27.5 65.97,27.97 74.54,27.97 76.54,29.97 91.92,29.97 94.79,27.1 94.79,24.17 98.5,20.46 v98.5,11 | v98.5,9 99.85,7.65 R18.2 103.96,6.19 J6.4
  Top 1.016: F2.2 10.7,5.62 D4.2
  Top 1.27: J3.6 5.5,10.25 v7.88,7.88 9.75,6 F2.2
  Bottom 0.254: v7.88,7.88 9.5,9.5 16,9.5 18,11.5 v18,12 | v62.5,29 64,27.5 v65,27.5 | v98.5,11 v98.5,9
PWM1
  Top 0.152: Q1.1 22.61,9.04 R2.1
PWM1_FUSE
  Top 1.016: Q1.3 F1.2
PWM1_GATE  (via drill 0.3)
  Top 0.15: v54.5,11 v59.5,11 | v50.5,11 44,11 42.22,9.22 26.07,9.22 25.85,9 R2.2 | IC1.33.2 87.88,10.39 87.33,10.94 v87,10.94
  Top 0.152: R3.2 R2.2
  Bottom 0.15: v54.5,11 v50.5,11 | v59.5,11 86.94,11 v87,10.94
  Bottom 0.2: IC1.33 IC1.33.2
PWM1_IN  (via drill 0.3)
  Top 0.254: v17,12 17,12.5 18.17,13.67 25.36,13.67 27.86,11.17 38.33,11.17 39,10.5 40,10.5 40.5,11 40.5,19.5 41,20 44,20 44.5,20.5 44.5,24.5 46,26 46,30.67 47,31.67 62.33,31.67 63.7,30.3 v63.7,29.9 | v65.5,28.35 74.38,28.35 76.38,30.35 92.08,30.35 95.17,27.26 95.17,24.33 99.5,20 v99.5,16.5 | R17.2 102.5,17 102.81,16.69 J5.4
  Top 1.016: F1.1 10.7,9.62 D3.2
  Top 1.27: J3.4 7.75,17.75 8,17.5 8,11 v9,10 F1.1
  Bottom 0.254: v9,10 15,10 v17,12 | v63.7,29.9 65.1,28.5 65.35,28.5 v65.5,28.35 | v99.5,16.5 99.69,16.69 J5.4
RXCAN
  Top 0.2: IC2.4 61.09,27.91 61.5,27.5 61.5,24.2 61.11,23.81 IC3.2
RXD  (via drill 0.3)
  Top 0.152: J1.3 109.48,26.23 108.97,25.72 104.65,25.72 101.85,22.92 97.58,22.92 96,24.5 96,28.39 93.59,30.8 75.41,30.8 73.38,28.78 65.14,28.78 63,26.64 63,13.5 62,12.5 54,12.5 53.5,12 53.5,10 54.12,9.38 55.21,9.38 55.34,9.25 v56,9.25
  Bottom 0.152: IC1.10 56.06,4.8 56.06,6.5 56,6.56 v56,9.25
  Bottom 0.2: IC1.10.2 IC1.10
SCL  (via drill 0.3)
  Top 0.152: IC1.5.2 52.32,9.82 52.5,10 52.5,12 54,13.5 62,13.5 62.44,13.94 62.44,27.23 66.57,31.36 66.8,31.36 | 66.8,31.36 103.14,31.36 105.5,29 110.75,29 J1.6 | R23.1 59.5,30 v60.5,29 | 66.8,31.36 66.8,30.8 v66,30
  Bottom 0.152: v60.5,29 60.5,29.36 61.64,30.5 65.5,30.5 v66,30
  Bottom 0.2: IC1.5 IC1.5.2
SDA  (via drill 0.3)
  Top 0.15: v60.5,30 62.55,27.95
  Top 0.152: IC1.3.2 52,10.76 52,12 54,14 62,14 62.16,14.16 62.16,27.55 62.55,27.95 66.25,31.64 108.11,31.64 J1.4 | R22.1 48.15,28.65 v48,28.5
  Bottom 0.152: v48,28.5 48,29.5 49,30.5 60,30.5 v60.5,30
  Bottom 0.2: IC1.3 IC1.3.2
SPI1_CS
  Top 0.152: J4.4 34.73,0.5 45.63,0.5 46.89,1.76 57.75,1.76 58.59,0.92 IC1.12.2
  Bottom 0.2: IC1.12 IC1.12.2
SPI1_MISO  (via drill 0.3)
  Top 0.152: J4.6 29.5,3.19 29.5,5.5 30,6 38.73,6 41.68,3.05 44.05,3.05 44.95,3.95 44.95,8.72 v46,9.76 | v55,10 v59.5,10
  Bottom 0.152: v46,9.76 51.76,9.76 51.94,9.94 53.83,9.94 53.89,10 v55,10 | 90.42,8.5 88.92,10 v59.5,10
  Bottom 0.2: IC1.35.2 90.42,8.5 IC1.35
SPI1_MOSI
  Top 0.152: J4.5 32.19,5.5 38.83,5.5 41.56,2.77 44.27,2.77 46.16,4.66 58.34,4.66 58.6,4.4 58.6,2.96 58.5,2.86 58.5,2.5 58.96,2.04 91.54,2.04 IC1.38
  Bottom 0.2: IC1.38.2 IC1.38
SPI1_SCK
  Top 0.152: IC1.40.2 94.65,0.92 93.81,1.76 58.74,1.76 58.46,2.04 37.96,2.04 37,3 34.5,3 33.5,4 J4.3
  Bottom 0.2: IC1.40.2 IC1.40
SPI_CS
  Top 0.152: IC3.16 71.46,22.54 72,22 72,10.37 73.91,8.46 73.91,4.73 IC1.24
  Bottom 0.2: IC1.24.2 IC1.24
SPI_MISO
  Top 0.152: IC1.21.2 72.64,8.86 71.5,10 71.5,20.5 70.73,21.27 IC3.15
  Bottom 0.2: IC1.21 IC1.21.2
SPI_MOSI
  Top 0.152: IC1.19.2 70.1,11.9 66.5,15.5 66.5,19 67.5,20 IC3.14
  Bottom 0.152: IC1.19 IC1.19.2
SPI_SCK  (via drill 0.3)
  Top 0.152: IC1.23.2 74.46,8.54 72.5,10.5 v72.5,17 | v67,18.5 67.23,18.73 IC3.13
  Bottom 0.152: IC1.23 IC1.23.2 | v72.5,17 71,18.5 v67,18.5
TXCAN
  Top 0.2: IC2.1 56.59,24.09 57.58,25.08 IC3.1
TXD  (via drill 0.3)
  Top 0.152: v53.5,9 53,9.5 53,12 54,13 62.1,13 62.72,13.62 62.72,26.76 65.02,29.06 73.27,29.06 75.29,31.08 93.71,31.08 96.28,28.51 96.28,24.62 97.7,23.2 101.73,23.2 104.53,26 107.83,26 v108,26.18
  Bottom 0.152: v53.5,9 53.5,6.52 53.52,6.5 53.52,4.8 IC1.8 | v108,26.18 110.47,26.18 J1.5
  Bottom 0.2: IC1.8.2 IC1.8

## Text on the board
Top: REV002 | BS
Bottom: LS
tPlace: - 24V + | G27 | G22 | G17 | G4 | +5V | P1 | Zero / Point / Module | VIN | P0 | L | CAN | SPI1 | H | TER
bPlace: I2C | | | 3V3 | | | SDA | | | SCL | | | GND | | | 24V / / 5V | UART | 3V3 | RXD | TXD | GND | G5 | Kernel Config -> / dtoverlay=pwm-2chan,pin=12,func=4,pin2=13,func2=4 / dtoverlay=mcp2515-can0,oscillator=8000000,interrupt=25 / / /etc/network/interfaces.d/can0 -> / auto can0 / iface can0 can static / bitrate 500000 / up ifconfig $IFACE txqueuelen 128 | G13 | 24V / / 5V | MOSI | SCK | 3V3 | G6 | SPI1 | MISO | CS | GND | G12 | 5V G23 GND
tStop: REV002